# EAGLE board supervisor (EAGLE 5.11)
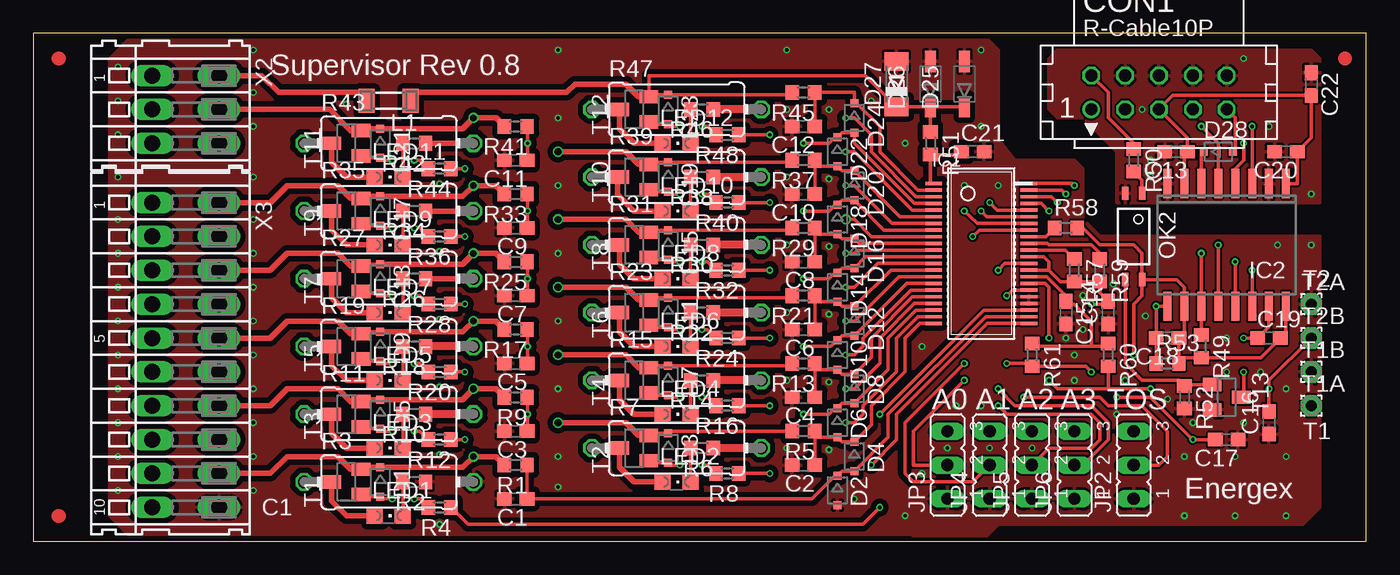
[diagram p0: board, top side]
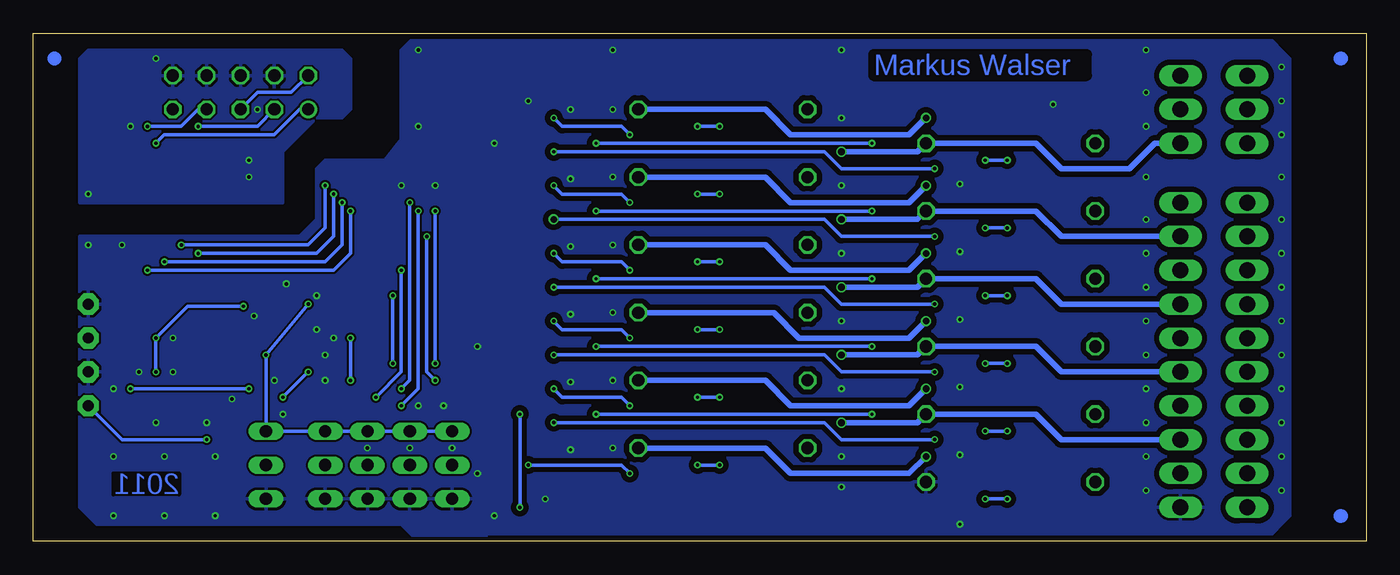
[diagram p1: board, bottom side, seen from below]

Size 100 x 38.09 mm. Coordinates in mm from the lower left corner, seen from the top.
Outline: 0,0 100,0 100,38.09 0,38.09 0,0
Copper layers (1*16): Top 0.035mm / dielectric 1.5mm / Bottom 0.035mm
Design rules "PCB-POOL HighSpec *": minimum track width 0.125mm, minimum drill 0.2mm, track to track 0.125mm, track to pad 0.125mm, pad to pad 0.125mm, via to via 0.125mm, smd to smd 0.125mm, copper to edge 0.3mm, drill to drill 0.2mm, minimum pad ring 0.2mm, minimum via ring 0.125mm, stop-mask expansion 0.075mm, vias tented up to drill 20mil, thermal gap 0.2mm

## Footprints (pad centres in the part's own frame; a part is rotated, then mirrored left to right if it is on the bottom)
C0603 = smd 1.1 x 1: 1 -0.85,0; 2 0.85,0
CON10 = drill 0.914 round: 1 -5.08,-1.27 | drill 0.914 octagon: 2 -5.08,1.27; 3 -2.54,-1.27; 4 -2.54,1.27; 5 0,-1.27; 6 0,1.27; 7 2.54,-1.27; 8 2.54,1.27; 9 5.08,-1.27; 10 5.08,1.27
SOD323-R = smd 0.6 x 0.6: A 1.1,0; C -1.1,0
SOD123 = smd 1.6 x 0.8: 1 -1.7,0; 2 1.7,0
MINIMELF = smd 1.4 x 1.8: A 1.7,0; C -1.7,0
SSOP44DL = smd 0.25 x 1.25: 1 -5.25,-3.575; 2 -4.75,-3.575; 3 -4.25,-3.575; 4 -3.75,-3.575; 5 -3.25,-3.575; 6 -2.75,-3.575; 7 -2.25,-3.575; 8 -1.75,-3.575; 9 -1.25,-3.575; 10 -0.75,-3.575; 11 -0.25,-3.575; 12 0.25,-3.575; 13 0.75,-3.575; 14 1.25,-3.575; 15 1.75,-3.575; 16 2.25,-3.575; 17 2.75,-3.575; 18 3.25,-3.575; 19 3.75,-3.575; 20 4.25,-3.575; 21 4.75,-3.575; 22 5.25,-3.575; 23 5.25,3.575; 24 4.75,3.575; 25 4.25,3.575; 26 3.75,3.575; 27 3.25,3.575; 28 2.75,3.575; 29 2.25,3.575; 30 1.75,3.575; 31 1.25,3.575; 32 0.75,3.575; 33 0.25,3.575; 34 -0.25,3.575; 35 -0.75,3.575; 36 -1.25,3.575; 37 -1.75,3.575; 38 -2.25,3.575; 39 -2.75,3.575; 40 -3.25,3.575; 41 -3.75,3.575; 42 -4.25,3.575; 43 -4.75,3.575; 44 -5.25,3.575
SO16W = smd 0.6 x 2.2: 1 -4.445,-4.6; 2 -3.175,-4.6; 3 -1.905,-4.6; 4 -0.635,-4.6; 5 0.635,-4.6; 6 1.905,-4.6; 7 3.175,-4.6; 8 4.445,-4.6; 9 4.445,4.6; 10 3.175,4.6; 11 1.905,4.6; 12 0.635,4.6; 13 -0.635,4.6; 14 -1.905,4.6; 15 -3.175,4.6; 16 -4.445,4.6
JP2 = drill 0.914 long: 1 -2.54,0; 2 0,0; 3 2.54,0
SM-1206 = smd 1.2 x 1.8: 1 -1.65,0; 2 1.65,0
CHIPLED_0805 = smd 1.2 x 1.2: A 0,-1.05; C 0,1.05
MINI-FLAT-4 = smd 1 x 0.5: 1 -3.24,0.635; 2 -3.24,-0.635; 3 3.24,-0.635; 4 3.24,0.635
R0603 = smd 1 x 1.1: 1 -0.85,0; 2 0.85,0
0411/12 = drill 0.914 octagon: 1 -6.35,0; 2 6.35,0
SOT23 = smd 1 x 1.4: 1 -0.95,-1.1; 2 0.95,-1.1; 3 0,1.1
1,6/0,8 = drill 0.813 pad 1.6 octagon: 1 0,0
233-503 = drill 1.2 long: A1 -2.54,2.5; A2 0,2.5; A3 2.54,2.5; B1 -2.54,-2.5; B2 0,-2.5; B3 2.54,-2.5
233-510 = drill 1.2 long: A1 -11.43,2.5; A2 -8.89,2.5; A3 -6.35,2.5; A4 -3.81,2.5; A5 -1.27,2.5; A6 1.27,2.5; A7 3.81,2.5; A8 6.35,2.5; A9 8.89,2.5; A10 11.43,2.5; B1 -11.43,-2.5; B2 -8.89,-2.5; B3 -6.35,-2.5; B4 -3.81,-2.5; B5 -1.27,-2.5; B6 1.27,-2.5; B7 3.81,-2.5; B8 6.35,-2.5; B9 8.89,-2.5; B10 11.43,-2.5

## Placement (x,y rotation side)
C1  100n  [C0603]  36.2,3.17 180 top
C2  100n  [C0603]  57.78,5.71 180 top
C3  100n  [C0603]  36.2,8.26 180 top
C4  100n  [C0603]  57.78,10.79 180 top
C5  100n  [C0603]  36.2,13.34 180 top
C6  100n  [C0603]  57.78,15.88 180 top
C7  100n  [C0603]  36.2,18.41 180 top
C8  100n  [C0603]  57.78,20.95 180 top
C9  100n  [C0603]  36.2,23.5 180 top
C10  100n  [C0603]  57.78,26.04 180 top
C11  100n  [C0603]  36.2,28.57 180 top
C12  100n  [C0603]  57.78,31.11 180 top
C13  100n  [C0603]  85.72,29.21 180 top
C14  1u  [C0603]  80.64,17.14 90 top
C15  1u  [C0603]  77.47,17.14 270 top
C16  1u  [C0603]  92.71,8.89 90 top
C17  1u  [C0603]  89.53,7.62 180 top
C18  100n  [C0603]  85.09,15.24 180 top
C19  100n  [C0603]  92.71,15.24 0 top
C20  100n  [C0603]  93.98,29.21 180 top
C21  100n  [C0603]  70.48,29.21 0 top
C22  1u  [C0603]  95.89,34.29 270 top
CON1  SPI  [CON10]  84.45,33.66 0 top
D1  MM3Z12VT1G  [SOD323-R]  26.04,4.45 270 top
D2  PDZ6.2B  [SOD323-R]  60.33,3.81 270 top
D3  MM3Z12VT1G  [SOD323-R]  47.62,6.99 270 top
D4  PDZ6.2B  [SOD323-R]  61.59,6.35 270 top
D5  MM3Z12VT1G  [SOD323-R]  26.04,9.53 270 top
D6  PDZ6.2B  [SOD323-R]  60.33,8.89 270 top
D7  MM3Z12VT1G  [SOD323-R]  47.62,12.06 270 top
D8  PDZ6.2B  [SOD323-R]  61.59,11.43 270 top
D9  MM3Z12VT1G  [SOD323-R]  26.04,14.61 270 top
D10  PDZ6.2B  [SOD323-R]  60.33,13.97 270 top
D11  MM3Z12VT1G  [SOD323-R]  47.62,17.14 270 top
D12  PDZ6.2B  [SOD323-R]  61.59,16.51 270 top
D13  MM3Z12VT1G  [SOD323-R]  26.04,19.68 270 top
D14  PDZ6.2B  [SOD323-R]  60.33,19.05 270 top
D15  MM3Z12VT1G  [SOD323-R]  47.62,22.23 270 top
D16  PDZ6.2B  [SOD323-R]  61.59,21.59 270 top
D17  MM3Z12VT1G  [SOD323-R]  26.04,24.77 270 top
D18  PDZ6.2B  [SOD323-R]  60.33,24.13 270 top
D19  MM3Z12VT1G  [SOD323-R]  47.62,27.3 270 top
D20  PDZ6.2B  [SOD323-R]  61.59,26.67 270 top
D21  MM3Z12VT1G  [SOD323-R]  26.04,29.84 270 top
D22  PDZ6.2B  [SOD323-R]  60.33,29.21 270 top
D23  MM3Z12VT1G  [SOD323-R]  47.62,32.38 270 top
D24  PDZ6.2B  [SOD323-R]  61.59,31.75 270 top
D25  BAT46W  [SOD123]  69.85,34.29 90 top
D26  BAT46W  [SOD123]  67.31,34.29 90 top
D27  BZV55-C62  [MINIMELF]  64.77,34.29 90 top
D28  CMDSH2-3  [SOD323-R]  88.9,29.21 0 top
IC1  LTC6802-2  [SSOP44DL]  71.12,21.59 270 top
IC2  ADuM1401  [SO16W]  89.53,22.23 180 top
JP2  TOS  [JP2]  82.55,5.71 90 top
JP3  A0  [JP2]  68.58,5.71 90 top
JP4  A1  [JP2]  71.75,5.71 90 top
JP5  A2  [JP2]  74.93,5.71 90 top
JP6  A3  [JP2]  78.11,5.71 90 top
L1  BLM31PG121SN1L  [SM-1206]  26.67,33.02 180 top
LED1  RED  [CHIPLED_0805]  26.67,1.91 270 top
LED2  RED  [CHIPLED_0805]  48.26,4.45 270 top
LED3  RED  [CHIPLED_0805]  26.67,6.99 270 top
LED4  RED  [CHIPLED_0805]  48.26,9.53 270 top
LED5  RED  [CHIPLED_0805]  26.67,12.06 270 top
LED6  RED  [CHIPLED_0805]  48.26,14.61 270 top
LED7  RED  [CHIPLED_0805]  26.67,17.14 270 top
LED8  RED  [CHIPLED_0805]  48.26,19.68 270 top
LED9  RED  [CHIPLED_0805]  26.67,22.23 270 top
LED10  RED  [CHIPLED_0805]  48.26,24.77 270 top
LED11  RED  [CHIPLED_0805]  26.67,27.3 270 top
LED12  RED  [CHIPLED_0805]  48.26,29.84 270 top
OK2  TLP281  [MINI-FLAT-4]  82.55,22.86 270 top
R1  100  [R0603]  36.2,5.71 180 top
R2  470  [R0603]  28.57,4.45 180 top
R3  15  [0411/12]  26.67,4.45 0 top
R4  3k3  [R0603]  30.48,2.54 180 top
R5  100  [R0603]  57.78,8.26 180 top
R6  470  [R0603]  50.16,6.99 180 top
R7  15  [0411/12]  48.26,6.99 0 top
R8  3k3  [R0603]  52.07,5.08 180 top
R9  100  [R0603]  36.2,10.79 180 top
R10  470  [R0603]  28.57,9.53 180 top
R11  15  [0411/12]  26.67,9.53 0 top
R12  3k3  [R0603]  30.48,7.62 180 top
R13  100  [R0603]  57.78,13.34 180 top
R14  470  [R0603]  50.16,12.06 180 top
R15  15  [0411/12]  48.26,12.06 0 top
R16  3k3  [R0603]  52.07,10.16 180 top
R17  100  [R0603]  36.2,15.88 180 top
R18  470  [R0603]  28.57,14.61 180 top
R19  15  [0411/12]  26.67,14.61 0 top
R20  3k3  [R0603]  30.48,12.7 180 top
R21  100  [R0603]  57.78,18.41 180 top
R22  470  [R0603]  50.16,17.14 180 top
R23  15  [0411/12]  48.26,17.14 0 top
R24  3k3  [R0603]  52.07,15.24 180 top
R25  100  [R0603]  36.2,20.95 180 top
R26  470  [R0603]  28.57,19.68 180 top
R27  15  [0411/12]  26.67,19.68 0 top
R28  3k3  [R0603]  30.48,17.78 180 top
R29  100  [R0603]  57.78,23.5 180 top
R30  470  [R0603]  50.16,22.23 180 top
R31  15  [0411/12]  48.26,22.23 0 top
R32  3k3  [R0603]  52.07,20.32 180 top
R33  100  [R0603]  36.2,26.04 180 top
R34  470  [R0603]  28.57,24.77 180 top
R35  15  [0411/12]  26.67,24.77 0 top
R36  3k3  [R0603]  30.48,22.86 180 top
R37  100  [R0603]  57.78,28.57 180 top
R38  470  [R0603]  50.16,27.3 180 top
R39  15  [0411/12]  48.26,27.3 0 top
R40  3k3  [R0603]  52.07,25.4 180 top
R41  100  [R0603]  36.2,31.11 180 top
R42  470  [R0603]  28.57,29.84 180 top
R43  15  [0411/12]  26.67,29.84 0 top
R44  3k3  [R0603]  30.48,27.94 180 top
R45  100  [R0603]  57.78,33.66 180 top
R46  470  [R0603]  50.16,32.38 180 top
R47  15  [0411/12]  48.26,32.38 0 top
R48  3k3  [R0603]  52.07,30.48 180 top
R49  3k9  [R0603]  87.63,14.61 270 top
R50  3k9  [R0603]  82.55,28.57 270 top
R51  20  [R0603]  67.31,29.84 270 top
R52  100k  [R0603]  86.36,10.79 270 top
R53  100k  [R0603]  85.09,13.34 0 top
R57  1M  [R0603]  78.11,20.32 270 top
R58  1M  [R0603]  77.47,23.5 0 top
R59  1M  [R0603]  80.01,20.32 270 top
R60  100k  [R0603]  80.64,13.97 270 top
R61  100k  [R0603]  74.93,13.97 270 top
T1  BSS308PE  [SOT23]  23.5,4.45 90 top
T1A  WIREPAD1,6/0,8  [1,6/0,8]  95.89,10.16 0 top
T1B  WIREPAD1,6/0,8  [1,6/0,8]  95.89,12.7 0 top
T2  BSS308PE  [SOT23]  45.09,6.99 90 top
T2A  WIREPAD1,6/0,8  [1,6/0,8]  95.89,17.78 0 top
T2B  WIREPAD1,6/0,8  [1,6/0,8]  95.89,15.24 0 top
T3  BSS308PE  [SOT23]  23.5,9.53 90 top
T4  BSS308PE  [SOT23]  45.09,12.06 90 top
T5  BSS308PE  [SOT23]  23.5,14.61 90 top
T6  BSS308PE  [SOT23]  45.09,17.14 90 top
T7  BSS308PE  [SOT23]  23.5,19.68 90 top
T8  BSS308PE  [SOT23]  45.09,22.23 90 top
T9  BSS308PE  [SOT23]  23.5,24.77 90 top
T10  BSS308PE  [SOT23]  45.09,27.3 90 top
T11  BSS308PE  [SOT23]  23.5,29.84 90 top
T12  BSS308PE  [SOT23]  45.09,32.38 90 top
T13  PMV30UN  [SOT23]  89.53,10.79 270 top
X2  11..12  [233-503]  11.43,32.38 270 top
X3  1..10  [233-510]  11.43,13.97 270 top

## Library data of the parts
C1-C22 R1-R53 R57-R61 = resistor
CON1 = con-harting; OC_FARNELL: unknown; OC_NEWARK: unknown
D1-D24 T1-T12 = icontroller
D25 D26 = semicon-smd-ipc
D27 D28 = diode
IC1 T13 = ltc6802
IC2 = spisolator
JP2-JP6 = jumper
L1 = inductor-neosid
LED1-LED12 = led
OK2 = optocoupler; OC_FARNELL: unknown; OC_NEWARK: unknown
T1A T1B T2A T2B = wirepad
X2 X3 = con-wago

## Nets
+5V: C13.1 C20.1 C22.2 CON1.2 CON1.5 IC2.1 IC2.7 R50.1
GND: C1.2 C2.2 C3.2 C4.2 C5.2 C6.2 C7.2 C8.2 C9.2 C10.2 C11.2 C12.2 C14.1 C15.2 C16.1 C17.1 C21.2 D2.A D25.2 D26.2 D27.A IC1.26 IC1.27 JP2.1 JP3.1 JP4.1 JP5.1 JP6.1 R2.1 R3.2 R52.2 T1B.1 T2A.1 T13.2 X3.A10
GNDIO: C13.2 C20.2 C22.1 CON1.4 CON1.6 CON1.8 CON1.10 IC2.2 IC2.8 OK2.2
N$1: LED1.C R2.2
N$2: D1.A R4.2 T1.1
N$3: LED1.A R3.1 T1.3
N$4: C1.1 D2.C D4.A IC1.24 R1.1
N$5: D1.C R1.2 R6.1 R7.2 T1.2 X3.A9
N$6: C2.1 D4.C D6.A IC1.22 R5.1
N$7: C17.2 IC1.28 R61.2 T1A.1
N$8: IC1.23 R8.1
N$9: C5.1 D10.C D12.A IC1.16 R17.1
N$10: D3.A R8.2 T2.1
N$11: LED2.A R7.1 T2.3
N$12: LED2.C R6.2
N$13: D3.C R5.2 R10.1 R11.2 T2.2 X3.A8
N$14: C3.1 D6.C D8.A IC1.20 R9.1
N$15: IC1.21 R12.1
N$16: IC1.17 R20.1
N$17: D5.A R12.2 T3.1
N$18: LED3.A R11.1 T3.3
N$19: LED3.C R10.2
N$20: D5.C R9.2 R14.1 R15.2 T3.2 X3.A7
N$21: IC1.34 R57.1
N$22: IC1.19 R16.1
N$23: D9.A R20.2 T5.1
N$24: D7.A R16.2 T4.1
N$25: LED4.A R15.1 T4.3
N$26: LED4.C R14.2
N$27: D7.C R13.2 R18.1 R19.2 T4.2 X3.A6
N$28: C4.1 D8.C D10.A IC1.18 R13.1
N$29: LED5.A R19.1 T5.3
N$30: LED5.C R18.2
N$31: D9.C R17.2 R22.1 R23.2 T5.2 X3.A5
N$32: C15.1 IC1.30 R60.1 R61.1
N$33: C6.1 D12.C D14.A IC1.14 R21.1
N$34: IC1.15 R24.1
N$35: D11.A R24.2 T6.1
N$36: LED6.A R23.1 T6.3
N$37: LED6.C R22.2
N$38: D11.C R21.2 R26.1 R27.2 T6.2 X3.A4
N$39: C16.2 IC1.29 R60.2 T2B.1
N$40: C7.1 D14.C D16.A IC1.12 R25.1
N$41: IC1.13 R28.1
N$42: D13.A R28.2 T7.1
N$43: LED7.A R27.1 T7.3
N$44: LED7.C R26.2
N$45: D13.C R25.2 R30.1 R31.2 T7.2 X3.A3
N$46: IC1.37 JP3.2
N$47: C8.1 D16.C D18.A IC1.10 R29.1
N$48: IC1.11 R32.1
N$49: D15.A R32.2 T8.1
N$50: LED8.A R31.1 T8.3
N$51: LED8.C R30.2
N$52: D15.C R29.2 R34.1 R35.2 T8.2 X3.A2
N$53: IC1.38 JP4.2
N$54: C9.1 D18.C D20.A IC1.8 R33.1
N$55: IC1.9 R36.1
N$56: D17.A R36.2 T9.1
N$57: LED9.A R35.1 T9.3
N$58: LED9.C R34.2
N$59: D17.C R33.2 R38.1 R39.2 T9.2 X3.A1
N$60: IC1.39 JP5.2
N$61: C10.1 D20.C D22.A IC1.6 R37.1
N$62: IC1.7 R40.1
N$63: D19.A R40.2 T10.1
N$64: LED10.A R39.1 T10.3
N$65: LED10.C R38.2
N$66: D19.C R37.2 R42.1 R43.2 T10.2 X2.A3
N$67: IC1.40 JP6.2
N$68: C11.1 D22.C D24.A IC1.4 R41.1
N$69: IC1.5 R44.1
N$70: D21.A R44.2 T11.1
N$71: LED11.A R43.1 T11.3
N$72: LED11.C R42.2
N$74: IC1.43 IC2.11 R49.1
N$75: C12.1 D24.C IC1.2 R45.1
N$76: IC1.3 R48.1
N$77: D23.A R48.2 T12.1
N$78: LED12.A R47.1 T12.3
N$79: LED12.C R46.2
N$80: L1.2 X2.A1
N$81: IC1.44 IC2.12
N$82: IC1.42 IC2.13
N$83: IC1.41 IC2.14
N$84: D21.C R41.2 R46.1 R47.2 T11.2 X2.A2
N$85: IC1.32 JP2.2
N$86: C18.2 C19.1 IC2.9 IC2.15 R53.1 T13.3
N$87: IC1.35 R59.1
N$88: IC1.36 R58.1
N$89: OK2.3 R52.1 T13.1
N$90: D28.C IC2.6
N$92: CON1.7 IC2.3
N$93: CON1.3 IC2.5
N$94: CON1.1 IC2.4
N$95: CON1.9 D28.A
N$96: OK2.1 R50.2
N$98: C21.1 IC1.1 R51.2
N$100: D23.C D25.1 D26.1 D27.C L1.1 R45.2 R51.1 T12.2
N$103: IC1.25 R4.1
VCC: C14.2 C18.1 C19.2 IC1.31 IC1.33 IC2.10 IC2.16 JP2.3 JP3.3 JP4.3 JP5.3 JP6.3 OK2.4 R49.2 R53.2 R57.2 R58.2 R59.2

## Tracks (layer width: path | path; a pad name or v marks a point on that pad's centre or on a via)
+5V
  Top 0.254: IC2.7 86.36,29 C13.1 86.58,30.27 CON1.5 85.51,33.44 C22.2 95.89,30.27 C20.1 94.83,26.82 IC2.1 | R50.1 82.55,29.84 80.64,31.75 80.64,33.66 CON1.2
  Bottom 0.254: CON1.2 80.64,33.66 83.19,33.66 CON1.5
GND  (via drill 0.25 pad 0.25)
  other vias: 16.51,27.3 16.51,36.83 71.75,6.99 86.36,1.91 69.85,26.67 6.35,35.56 6.35,33.02 6.35,30.48 6.35,27.3 6.35,24.13 6.35,21.59 6.35,19.05 6.35,16.51 6.35,13.97 6.35,11.43 6.35,8.89 6.35,6.35 6.35,3.81 16.51,31.11 72.39,26.67 90.17,1.91 93.98,1.91 74.93,6.99 39.37,36.83 71.12,10.16 81.28,9.53 69.22,10.16 68.58,6.99 78.11,12.06 16.51,8.89 16.51,13.97 16.51,19.05 16.51,24.13 16.51,21.59 16.51,16.51 16.51,11.43 16.51,6.35 56.52,17.14 56.52,12.06 56.52,6.99 56.52,22.23 56.52,27.3 56.52,32.38 39.37,6.35 39.37,11.43 39.37,16.51 39.37,21.59 39.37,26.67 39.37,31.75 16.51,33.66 65.41,29.84 62.87,33.02 78.74,15.88 78.11,13.97 81.92,12.06 77.47,15.24 16.51,3.81 56.52,36.83 71.12,36.83 71.12,31.11 65.41,1.91 61.59,3.17 66.67,14.61 89.53,15.24 89.53,12.7 90.81,8.89 93.98,11.43 93.34,22.23 92.08,12.7 90.17,6.35 86.36,6.35 93.98,6.35 85.09,10.67 59.69,11.94 59.69,17.02 59.69,6.86 59.69,22.1 59.69,27.18 59.69,32.38 30.48,6.48 30.48,11.56 30.48,16.64 30.48,21.72 30.48,26.8 30.48,1.27 78.74,18.41 81.03,19.3 83.44,16.89 95.89,22.23 23.5,32.77 66.67,5.08 39.37,4.06 87,8.89
  pour Bottom (isolate 0.152): 69.22,27.94 71.12,27.94 71.12,31.75 73.66,28.57 78.11,28.57 78.74,27.94 78.74,24.13 80.01,22.86 96.52,22.86 96.52,2.54 95.25,1.27 72.39,1.27 71.12,0 66.04,0 66.04,10.79 69.22,13.97
  pour Top (isolate 0.152): 69.22,27.94 71.12,27.94 71.12,31.75 73.66,28.57 78.11,28.57 78.74,27.94 78.74,24.13 80.01,22.86 96.52,22.86 96.52,2.54 95.25,1.27 72.39,1.27 71.12,0 66.04,0 66.04,10.79 69.22,13.97
  pour Top (isolate 0.406): 5.71,36.2 7.62,38.1 71.12,38.1 72.39,36.83 72.39,27.94 69.22,27.94 69.22,13.97 66.04,10.79 66.04,0 7.62,0 5.71,1.91
  pour Bottom (isolate 0.406): 5.71,36.2 7.62,38.1 71.12,38.1 72.39,36.83 72.39,27.94 69.22,27.94 69.22,13.97 66.04,10.79 66.04,0 7.62,0 5.71,1.91
GNDIO  (via drill 0.25)
  other vias: 90.81,36.2 83.19,32.38 83.82,28.57 95.89,26.04 92.71,31.11 83.82,27.3
  pour Bottom (isolate 0.152): 76.2,36.2 76.83,36.83 95.89,36.83 96.52,36.2 96.52,25.4 81.28,25.4 81.28,29.21 78.74,31.75 76.83,31.75 76.2,32.38
  pour Top (isolate 0.152): 76.83,31.75 76.2,32.38 76.2,36.2 76.83,36.83 95.89,36.83 96.52,36.2 96.52,25.4 81.28,25.4 81.28,29.21 78.74,31.75
N$1
  Top 0.254: R2.2 LED1.C
N$2  (via drill 0.25)
  Top 0.254: T1.1 24.75,3.35 D1.A 26.04,3.17 v26.92,3.17 | R4.2 29,3.17 v28.57,3.17
  Bottom 0.254: v26.92,3.17 v28.57,3.17
N$3
  Top 0.406: LED1.A 23.5,1.91 22.39,3 T1.3
  Top 0.61: R3.1 T1.3
N$4
  Top 0.254: IC1.24 71.45,16.84 64.14,9.53 64.14,7.79 D4.A 60.66,5.25 D2.C 60.16,4.91 58.42,3.17 C1.1 R1.1
N$5  (via drill 0.5)
  Top 0.254: T1.2 24.75,5.54
  Top 0.406: 24.75,5.54 D1.C 32.22,5.54 v33.02,6.35 34.71,6.35 R1.2 | T1.2 23.82,5.39 22.86,6.35 19.05,6.35 17.78,5.08 X3.A9
  Top 0.61: R7.2 R6.1
  Bottom 0.406: R7.2 45.09,6.99 43.18,5.08 34.29,5.08 v33.02,6.35
N$6
  Top 0.254: IC1.22 66.5,16.34 65.41,15.24 65.41,12.7 62.87,10.16 62.87,8.72 D4.C 60.66,7.45 D6.A 58.63,7.79 R5.1 C2.1
N$7  (via drill 0.25)
  Top 0.254: v79.38,12.7 78.95,13.12 R61.2 74.72,13.34 v73.03,13.34 | v81.28,10.79 83.82,10.79 v87,7.62 C17.2 | IC1.28 73.45,18.84 v73.03,18.41
  Bottom 0.254: v79.38,12.7 v81.28,10.79 | T1A.1 93.34,7.62 v87,7.62 | v73.03,13.34 v73.03,18.41
N$8  (via drill 0.25)
  Top 0.254: R8.1 v55.24,5.08 | v62.87,5.71 64.77,7.62 64.77,9.53 71.58,16.34 IC1.23
  Bottom 0.254: v55.24,5.08 55.88,5.71 v62.87,5.71
N$9  (via drill 0.25)
  Top 0.254: IC1.16 65.53,19.34 D12.A 60.66,15.41 D10.C 59.86,14.61 v57.78,14.61 | R17.1 37.08,15.58 v37.08,14.61 37.08,13.37 C5.1
  Bottom 0.254: v37.08,14.61 v57.78,14.61
N$10  (via drill 0.25)
  Top 0.254: T2.1 arc90 46.34,5.88 D3.A 47.62,5.71 v48.51,5.71 | R8.2 50.59,5.71 v50.16,5.71
  Bottom 0.254: v48.51,5.71 v50.16,5.71
N$11
  Top 0.406: LED2.A 45.09,4.45 43.98,5.54 T2.3
  Top 0.61: R7.1 T2.3
N$12
  Top 0.254: R6.2 49.31,6.34 LED2.C
N$13  (via drill 0.5)
  Top 0.254: T2.2 46.34,8.09 D3.C 47.8,8.26 R5.2
  Top 0.406: T2.2 45.41,7.93 44.45,8.89 v39.37,8.89
  Top 0.61: R11.2 R10.1
  Bottom 0.406: v39.37,8.89 33.66,8.89 R11.2 24.77,9.53 22.86,7.62 X3.A8
N$14  (via drill 0.25)
  Top 0.254: IC1.20 66.23,17.34 64.14,15.24 64.14,12.87 D8.A 60.66,10.33 D6.C 60.16,9.99 59.69,9.53 v57.78,9.53 | R9.1 37.08,10.63 v37.08,9.53 37.08,8.29 C3.1
  Bottom 0.254: v37.08,9.53 v57.78,9.53
N$15  (via drill 0.25)
  Top 0.254: IC1.21 66.37,16.84 64.77,15.24 64.77,12.7 62.23,10.16 62.23,9.53 61.59,8.89 v60.96,8.89 | R12.1 v32.38,7.62
  Bottom 0.254: v60.96,8.89 40.64,8.89 39.37,7.62 v32.38,7.62
N$16  (via drill 0.25)
  Top 0.254: IC1.17 65.83,18.84 62.23,15.24 62.23,14.61 61.59,13.97 v60.96,13.97 | R20.1 v32.38,12.7
  Bottom 0.254: v32.38,12.7 39.37,12.7 40.64,13.97 v60.96,13.97
N$17  (via drill 0.25)
  Top 0.254: T3.1 24.75,8.43 D5.A 26.04,8.26 v26.92,8.26 | R12.2 29,8.26 v28.57,8.26
  Bottom 0.254: v26.92,8.26 v28.57,8.26
N$18
  Top 0.406: T3.3 22.39,8.09 23.5,6.99 LED3.A
  Top 0.61: R11.1 T3.3
N$19
  Top 0.254: R10.2 LED3.C
N$20  (via drill 0.5)
  Top 0.254: T3.2 24.75,10.62
  Top 0.406: 24.75,10.62 D5.C 32.22,10.62 v33.02,11.43 34.71,11.43 R9.2 | X3.A7 17.78,10.16 19.05,11.43 22.86,11.43 23.82,10.47 T3.2
  Top 0.61: R15.2 R14.1
  Bottom 0.406: R15.2 45.09,12.06 43.18,10.16 34.29,10.16 v33.02,11.43
N$21
  Top 0.254: IC1.34 77.44,21.84 R57.1
N$22  (via drill 0.25)
  Top 0.254: IC1.19 66.1,17.84 63.5,15.24 63.5,13.34 61.59,11.43 v60.96,11.43 | R16.1 v55.24,10.16
  Bottom 0.254: v55.24,10.16 55.88,10.79 60.33,10.79 v60.96,11.43
N$23  (via drill 0.25)
  Top 0.254: T5.1 24.75,13.51 D9.A 26.04,13.34 v26.92,13.34 | R20.2 29,13.34 v28.57,13.34
  Bottom 0.254: v26.92,13.34 v28.57,13.34
N$24  (via drill 0.25)
  Top 0.254: T4.1 46.19,10.96 D7.A 47.62,10.79 v48.51,10.79 | R16.2 50.59,10.79 v50.16,10.79
  Bottom 0.254: v48.51,10.79 v50.16,10.79
N$25
  Top 0.406: LED4.A 45.09,9.53 43.98,10.62 T4.3
  Top 0.61: R15.1 T4.3
N$26
  Top 0.254: R14.2 49.31,11.43 LED4.C
N$27  (via drill 0.5)
  Top 0.254: R13.2 56.47,13.16 D7.C 46.34,13.16 T4.2
  Top 0.406: T4.2 45.41,13.02 44.45,13.97 v39.37,13.97
  Top 0.61: R19.2 R18.1
  Bottom 0.406: X3.A6 22.86,12.7 24.77,14.61 R19.2 33.66,13.97 v39.37,13.97
N$28
  Top 0.254: IC1.18 65.97,18.34 62.87,15.24 62.87,13.8 D8.C 60.66,12.53 D10.A 58.63,12.87 R13.1 C4.1
N$29
  Top 0.406: LED5.A 23.5,12.06 22.39,13.16 T5.3
  Top 0.61: R19.1 T5.3
N$30
  Top 0.254: R18.2 LED5.C
N$31  (via drill 0.5)
  Top 0.254: D9.C 24.75,15.71 T5.2 | R17.2 35.17,15.71
  Top 0.406: X3.A5 17.78,15.24 19.05,16.51 22.86,16.51 23.82,15.55 T5.2 | R17.2 34.71,16.51 v33.02,16.51 32.22,15.71 D9.C
  Top 0.61: R23.2 R22.1
  Bottom 0.406: R23.2 44.45,17.14 42.55,15.24 34.29,15.24 v33.02,16.51
N$32
  Top 0.254: IC1.30 76.05,19.84 77.47,18.41 C15.1 77.69,17.78 78.11,17.78 79.38,16.51 79.38,14.61 | R61.1 75.14,14.61 79.38,14.61 | 79.38,14.61 80.64,14.61 R60.1
N$33
  Top 0.254: IC1.14 64.33,20.34 D12.C 60.66,17.61 D14.A 58.63,17.95 R21.1 C6.1
N$34  (via drill 0.25)
  Top 0.254: IC1.15 64.92,19.84 61.59,16.51 v60.96,16.51 | R24.1 v55.24,15.24
  Bottom 0.254: v55.24,15.24 55.88,15.88 60.33,15.88 v60.96,16.51
N$35  (via drill 0.25)
  Top 0.254: T6.1 46.34,16.05 D11.A 47.62,15.88 v48.51,15.88 | R24.2 50.59,15.88 v50.16,15.88
  Bottom 0.254: v48.51,15.88 v50.16,15.88
N$36
  Top 0.406: LED6.A 45.09,14.61 43.98,15.71 T6.3
  Top 0.61: R23.1 T6.3
N$37
  Top 0.254: R22.2 49.31,16.5 LED6.C
N$38  (via drill 0.5)
  Top 0.254: T6.2 46.34,18.25 D11.C 56.77,18.25 R21.2
  Top 0.406: R27.2 R26.1 | v39.37,19.05 44.45,19.05 45.41,18.09 T6.2
  Bottom 0.406: v39.37,19.05 33.66,19.05 R27.2 24.77,19.68 22.86,17.78 X3.A4
N$39  (via drill 0.25)
  Top 0.254: v76.2,12.06 76.83,11.43 80.64,11.43 | 80.64,11.43 R60.2 | IC1.29 75.91,19.34 76.2,19.05 v76.2,15.24 | 80.64,11.43 v83.82,11.43 | T2B.1 92.71,12.06 v92.71,11.43 C16.2
  Bottom 0.254: v76.2,12.06 v76.2,15.24 | v83.82,11.43 v92.71,11.43
N$40  (via drill 0.25)
  Top 0.254: IC1.12 62.45,21.34 D16.A 60.66,20.49 D14.C 60.16,20.15 59.69,19.68 v57.78,19.68 | C7.1 37.08,18.58 v37.08,19.68 37.08,20.66 R25.1
  Bottom 0.254: v37.08,19.68 v57.78,19.68
N$41  (via drill 0.25)
  Top 0.254: IC1.13 63.38,20.84 61.59,19.05 v60.96,19.05 | R28.1 v32.38,17.78
  Bottom 0.254: v60.96,19.05 40.64,19.05 39.37,17.78 v32.38,17.78
N$42  (via drill 0.25)
  Top 0.254: T7.1 24.75,18.59 D13.A 26.04,18.41 v26.92,18.41 | v28.57,18.41 29,18.41 R28.2
  Bottom 0.254: v26.92,18.41 v28.57,18.41
N$43
  Top 0.406: R27.1 T7.3 22.39,18.25 23.5,17.14 LED7.A
N$44
  Top 0.254: R26.2 LED7.C
N$45  (via drill 0.5)
  Top 0.254: D13.C 24.75,20.79 T7.2
  Top 0.406: X3.A3 17.78,20.32 19.05,21.59 22.86,21.59 23.82,20.64 T7.2 | D13.C 32.22,20.79 v33.02,21.59 34.71,21.59 R25.2
  Top 0.61: R31.2 R30.1
  Bottom 0.406: R31.2 45.09,22.23 43.18,20.32 34.29,20.32 v33.02,21.59
N$46  (via drill 0.25)
  Top 0.254: JP3.2 66.04,5.71 66.04,8.26 v69.85,12.06 | v70.48,22.86 70.97,23.34 IC1.37
  Bottom 0.254: v69.85,12.06 70.48,12.7 v70.48,22.86
N$47
  Top 0.254: IC1.10 61.95,22.34 D16.C 60.66,22.69 D18.A 58.63,23.03 | 58.63,23.03 R29.1 | C8.1 58.63,23.03
N$48  (via drill 0.25)
  Top 0.254: IC1.11 61.84,21.84 61.59,21.59 v60.96,21.59 | R32.1 v55.24,20.32
  Bottom 0.254: v55.24,20.32 55.88,20.95 60.33,20.95 v60.96,21.59
N$49  (via drill 0.25)
  Top 0.254: T8.1 46.34,21.12 D15.A 47.62,20.95 v48.51,20.95 | R32.2 50.59,20.95 v50.16,20.95
  Bottom 0.254: v48.51,20.95 v50.16,20.95
N$50
  Top 0.406: LED8.A 45.09,19.68 43.98,20.79 T8.3
  Top 0.61: R31.1 T8.3
N$51
  Top 0.254: 49.53,20.32 49.53,19.91 LED8.C 49.31,21.59 R30.2
N$52  (via drill 0.5)
  Top 0.254: T8.2 46.34,23.32 D15.C 56.47,23.32 R29.2
  Top 0.406: R35.2 R34.1 | T8.2 45.41,23.18 44.45,24.13 v39.37,24.13
  Bottom 0.406: X3.A2 22.86,22.86 24.77,24.77 R35.2 33.66,24.13 v39.37,24.13
N$53  (via drill 0.25)
  Top 0.254: JP4.2 70.48,4.45 66.04,4.45 65.41,5.08 65.41,8.89 v69.85,13.34 | v69.85,24.77 70.83,23.84 IC1.38
  Bottom 0.254: v69.85,13.34 v69.85,24.77
N$54  (via drill 0.25)
  Top 0.254: IC1.8 63.83,23.34 D20.A 60.66,25.57 D18.C 60.16,25.23 59.69,24.77 v57.78,24.77 | C9.1 37.08,23.66 v37.08,24.77 37.08,25.87 R33.1
  Bottom 0.254: v37.08,24.77 v57.78,24.77
N$55  (via drill 0.25, 0.5)
  Top 0.254: IC1.9 62.88,22.84 61.59,24.13 v60.96,24.13 | R36.1 v32.38,22.86
  Bottom 0.254: v60.96,24.13 40.64,24.13 39.37,22.86 v32.38,22.86
N$56  (via drill 0.25)
  Top 0.254: T9.1 24.75,23.66 D17.A 26.2,23.5 v26.92,23.5 | v28.57,23.5 29,23.5 R36.2
  Bottom 0.254: v26.92,23.5 v28.57,23.5
N$57
  Top 0.406: R35.1 T9.3 22.39,23.32 23.5,22.23 LED9.A
N$58
  Top 0.254: R34.2 LED9.C
N$59  (via drill 0.5)
  Top 0.406: X3.A1 17.78,25.4 19.05,26.67 22.86,26.67 23.82,25.71 T9.2 24.75,25.86 D17.C 32.22,25.86 v33.02,26.67 34.71,26.67 R33.2
  Top 0.61: R39.2 R38.1
  Bottom 0.406: R39.2 45.09,27.3 43.18,25.4 34.29,25.4 v33.02,26.67
N$60  (via drill 0.25)
  Top 0.254: IC1.39 71.55,24.34 v71.12,24.77 | v72.39,10.16 73.03,9.53 79.38,9.53 80.01,8.89 80.01,7.62 79.38,6.99 76.2,6.99 JP5.2
  Bottom 0.254: v72.39,10.16 71.12,11.43 v71.12,24.77
N$61
  Top 0.254: IC1.6 65.03,24.34 D20.C 60.66,27.77 D22.A 58.63,28.11 R37.1 C10.1
N$62  (via drill 0.25)
  Top 0.254: IC1.7 64.42,23.84 61.59,26.67 v60.96,26.67 | R40.1 v55.24,25.4
  Bottom 0.254: v55.24,25.4 55.88,26.04 60.33,26.04 v60.96,26.67
N$63  (via drill 0.25)
  Top 0.254: T10.1 46.34,26.2 D19.A 47.62,26.04 v48.51,26.04 | v50.16,26.04 50.59,26.04 R40.2
  Bottom 0.254: v48.51,26.04 v50.16,26.04
N$64
  Top 0.406: LED10.A 45.09,24.77 43.81,26.04 43.81,27.14 T10.3
  Top 0.61: R39.1 T10.3
N$65
  Top 0.254: R38.2 49.31,26.66 LED10.C
N$66  (via drill 0.5)
  Top 0.254: T10.2 46.34,28.41 D19.C 56.47,28.41 R37.2
  Top 0.406: T10.2 45.41,28.25 44.45,29.21 v39.37,29.21 | R43.2 R42.1
  Bottom 0.406: X2.A3 15.88,29.84 17.78,27.94 22.86,27.94 24.77,29.84 R43.2 33.66,29.21 v39.37,29.21
N$67  (via drill 0.25)
  Top 0.254: JP6.2 78.74,5.71 80.64,7.62 80.64,8.89 79.38,10.16 73.66,10.16 v72.39,11.43 | v71.75,25.4 72.31,24.84 IC1.40
  Bottom 0.254: v72.39,11.43 71.75,12.06 v71.75,25.4
N$68  (via drill 0.25)
  Top 0.254: IC1.4 66.1,25.34 61.59,29.84 D24.A 60.66,30.65 D22.C 60.16,30.31 59.69,29.84 v57.78,29.84 | C11.1 37.08,28.87 v37.08,29.84 37.08,30.95 R41.1
  Bottom 0.254: v37.08,29.84 v57.78,29.84
N$69  (via drill 0.25)
  Top 0.254: IC1.5 65.97,24.84 61.59,29.21 v60.96,29.21 | R44.1 v32.38,27.94
  Bottom 0.254: v60.96,29.21 40.64,29.21 39.37,27.94 v32.38,27.94
N$70  (via drill 0.25)
  Top 0.254: T11.1 24.75,28.75 D21.A 26.2,28.57 v26.92,28.57 | v28.57,28.57 29,28.57 R44.2
  Bottom 0.254: v26.92,28.57 v28.57,28.57
N$71
  Top 0.406: R43.1 T11.3 22.39,28.41 23.5,27.3 LED11.A
N$72
  Top 0.254: R42.2 LED11.C
N$74  (via drill 0.25)
  Top 0.254: IC1.43 77.17,26.34 v77.47,26.04 | v87.63,21.59 IC2.11 R49.1
  Bottom 0.254: v77.47,26.04 77.47,22.86 78.74,21.59 v87.63,21.59
N$75
  Top 0.254: IC1.2 66.37,26.34 63.5,29.21 63.5,31.11 61.77,32.85 D24.C 61.59,33.66 R45.1 C12.1
N$76  (via drill 0.25)
  Top 0.254: IC1.3 66.23,25.84 62.87,29.21 62.87,30.48 61.59,31.75 v60.96,31.75 | R48.1 v55.24,30.48
  Bottom 0.254: v55.24,30.48 55.88,31.11 60.33,31.11 v60.96,31.75
N$77  (via drill 0.25)
  Top 0.254: T12.1 46.34,31.29 D23.A 47.62,31.11 v48.51,31.11 | R48.2 50.59,31.11 v50.16,31.11
  Bottom 0.254: v48.51,31.11 v50.16,31.11
N$78
  Top 0.406: LED12.A 45.09,29.84 43.98,30.95 T12.3
  Top 0.61: R47.1 T12.3
N$79
  Top 0.254: R46.2 49.31,31.75 LED12.C
N$80
  Top 0.406: X2.A1 17.14,34.92 18.41,33.66 25.02,33.66 L1.2
N$81  (via drill 0.25)
  Top 0.254: IC1.44 77.94,26.84 v78.11,26.67 | v88.9,22.23 IC2.12
  Bottom 0.254: v78.11,26.67 78.11,23.5 79.38,22.23 v88.9,22.23
N$82  (via drill 0.25)
  Top 0.254: IC1.42 76.39,25.84 v76.83,25.4 | v90.17,20.95 IC2.13
  Bottom 0.254: v76.83,25.4 76.83,22.23 78.11,20.95 v90.17,20.95
N$83  (via drill 0.25)
  Top 0.254: IC1.41 75.62,25.34 v76.2,24.77 | v91.44,20.32 IC2.14
  Bottom 0.254: v76.2,24.77 76.2,21.59 77.47,20.32 v91.44,20.32
N$84  (via drill 0.5)
  Top 0.406: X2.A2 22.23,32.38 23.82,30.8 T11.2 24.75,30.95 D21.C 32.22,30.95 v33.02,31.75 34.71,31.75 R41.2
  Top 0.61: R47.2 R46.1
  Bottom 0.406: R47.2 45.09,32.38 43.18,30.48 34.29,30.48 v33.02,31.75
N$85  (via drill 0.25)
  Top 0.254: IC1.32 72.91,20.84 v72.39,20.32 | v74.3,10.79 80.01,10.79 80.64,10.16 83.19,10.16 85.09,8.26 85.09,6.35 84.45,5.71 JP2.2
  Bottom 0.254: v72.39,20.32 72.39,12.7 v74.3,10.79
N$86  (via drill 0.25)
  Top 0.254: IC2.15 92.71,16.09 C19.1 v90.81,15.24 | IC2.9 v84.24,17.62 C18.2 R53.1 | v90.81,12.7 90.81,10.96 T13.3
  Bottom 0.254: v90.81,12.7 v90.81,15.24 88.42,17.62 v84.24,17.62
N$87
  Top 0.254: IC1.35 76.08,22.34 76.2,22.23 79.38,22.23 80.01,21.59 R59.1
N$88
  Top 0.254: IC1.36 75.97,22.84 R58.1
N$89
  Top 0.254: OK2.3 81.92,13.34 83.19,12.06 85.94,12.06 R52.1 86.46,11.74 T13.1
N$90
  Top 0.254: IC2.6 87.63,29.04 D28.C
N$92  (via drill 0.25)
  Top 0.254: IC2.3 v91.44,31.11
  Bottom 0.254: v91.44,31.11 88.9,31.11 87.63,32.38 CON1.7
N$93  (via drill 0.25)
  Top 0.254: v87.63,31.11 88.9,29.84 IC2.5
  Bottom 0.254: v87.63,31.11 83.19,31.11 CON1.3
N$94  (via drill 0.25)
  Top 0.254: v90.81,29.84 90.81,28.57 90.17,27.94 IC2.4
  Bottom 0.254: v90.81,29.84 90.17,30.48 81.92,30.48 80.01,32.38 CON1.1
N$95
  Top 0.254: CON1.9 90.17,31.75 90.17,29.38 D28.A
N$96
  Top 0.254: OK2.1 83.19,27.09 R50.2
N$98
  Top 0.254: IC1.1 67.31,26.84 R51.2 69.64,29 C21.1
N$100
  Top 0.254: R45.2 56.77,33.48 D23.C 46.34,33.48 T12.2 46.19,34.92 62.44,34.92 D27.C D26.1 | D26.1 D25.1 | D26.1 R51.1
  Top 0.406: T12.2 45.41,33.34 44.45,34.29 40.64,34.29 40.01,33.66 28.32,33.66 L1.1
N$103  (via drill 0.25)
  Top 0.254: IC1.25 71.31,17.34 v63.5,9.53 | v63.5,2.54 62.23,1.27 32.6,1.27 R4.1
  Bottom 0.254: v63.5,2.54 v63.5,9.53
VCC  (via drill 0.25)
  Top 0.254: IC1.33 75.81,21.34 76.2,20.95 76.2,20.32 | IC1.31 76.18,20.34 76.2,20.32 | OK2.4 85.79,19.62 86.36,19.05 IC2.10 86.36,15.24 C18.1 85.94,13.76 | IC2.16 93.98,15.66 C19.2 92.08,13.76 R49.2 85.94,13.76 | 85.94,13.76 R53.2 | OK2.4 83.19,18.41 82.55,17.78 v82.55,13.97 | OK2.4 83.19,21.59 82.55,22.23 80.01,22.23 78.74,23.5 R58.2 | 76.2,20.32 77.05,19.47 R57.2 R59.2 80.01,18.63 C14.2 arc-90 80.43,17.78 v79.38,17.78
  Bottom 0.254: JP3.3 JP4.3 JP5.3 JP6.3 JP2.3 v82.55,13.97 v79.38,17.78
(copper drawn outside any net)
  shapes: Bottom circle x3, Top circle x3

## Text on the board
Bottom: Markus Walser | 2011
tPlace: Supervisor Rev 0.8 | T2 | A0 | A1 | A2 | A3 | TOS | T1 | Energex | C1
tDocu: SPI